# EAGLE board rotary-encoders (EAGLE 8.0.2)
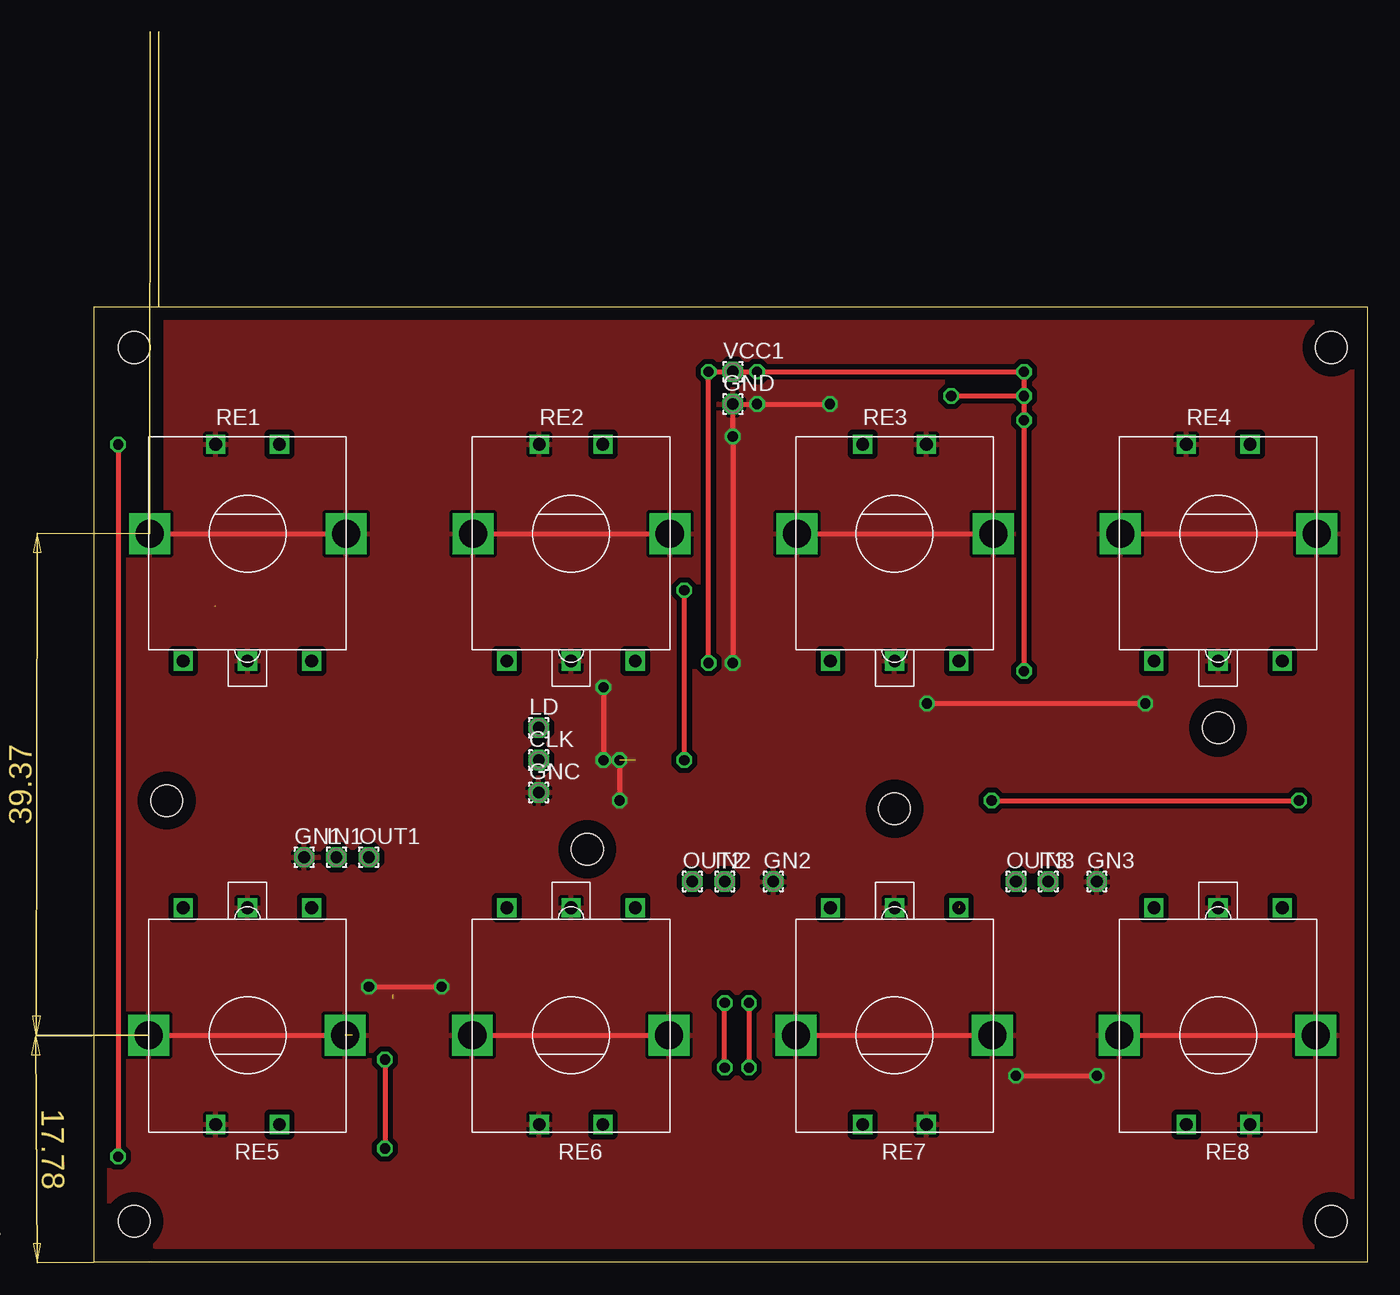
[diagram p0: board, top side]
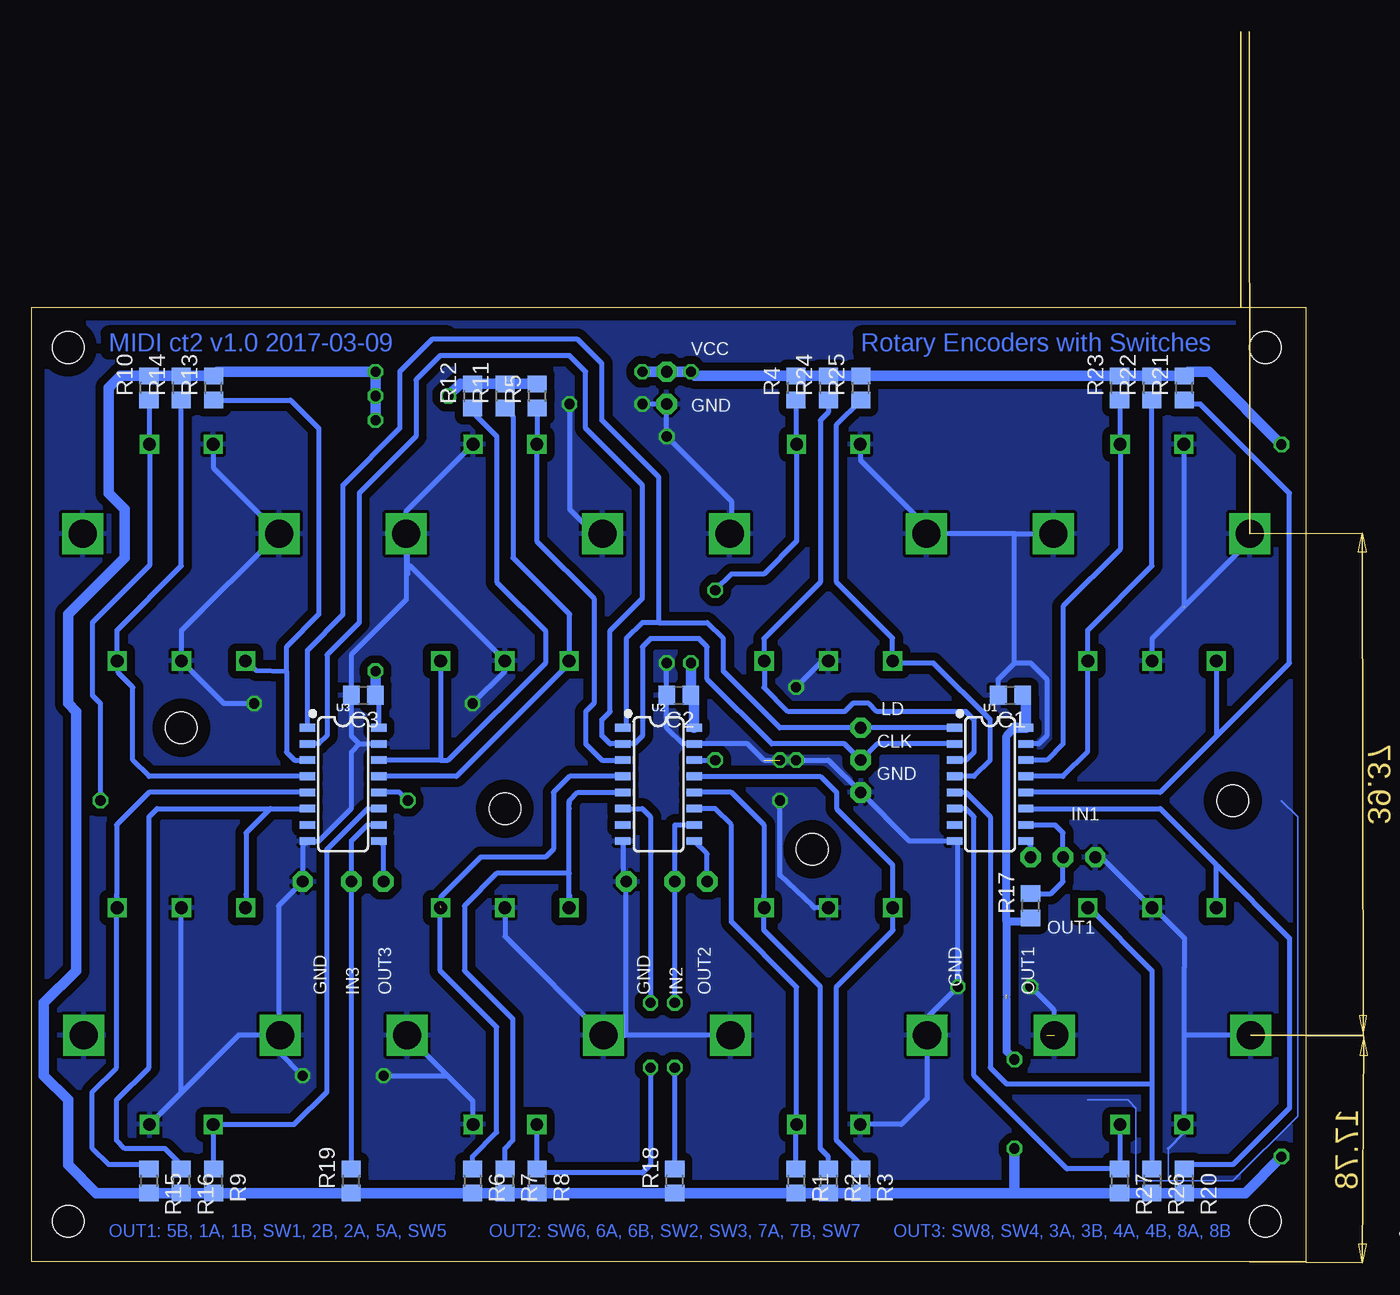
[diagram p1: board, bottom side, seen from below]

Size 100 x 74.92 mm. Coordinates in mm from the lower left corner, seen from the top.
Outline: 0,0 100,0 100,74.92 0,74.92 0,0
Copper layers (1*16): Top 0.035mm / dielectric 1.5mm / Bottom 0.035mm
Design rules "default *": minimum track width 10mil, minimum drill 24mil, track to track 16mil, track to pad 16mil, pad to pad 16mil, via to via 16mil, smd to smd 8mil, copper to edge 40mil, drill to drill 8mil, minimum pad ring 10mil, minimum via ring 8mil, stop-mask expansion 4mil, vias tented up to drill 0mil, thermal gap 10mil
Holes 2.5 mm at 97.16,3.17 3.17,3.17 3.17,71.75 97.16,71.75 5.71,36.2 88.27,41.91 62.87,35.56 38.73,32.38
Holes 0.6 mm at -7.92,73.15 -7.7,2.21 106.83,2.21 106.71,73.38
vRestrict: area 22.2,27.9 to 27.3,39.4; area 48.3,27.9 to 53.3,39.4; area 73,27.9 to 78.1,39.4

## Footprints (pad centres in the part's own frame; a part is rotated, then mirrored left to right if it is on the bottom)
C0805 = smd 1.3 x 1.5: 1 -0.95,0; 2 0.95,0
1,6/0,9 = drill 0.914 pad 1.6 octagon: 1 0,0
R0805 = smd 1.3 x 1.5: 1 -0.95,0; 2 0.95,0
EC16_SW = drill 1 square: A -5.04,-10; B 5.04,-10; C 0,-10; D -2.5,7; E 2.5,7 | drill 2.2 square: GND1 -7.675,0; GND2 7.75,0
SO16 = smd 0.6 x 1.2: 1 -4.445,-2.8; 2 -3.175,-2.8; 3 -1.905,-2.8; 4 -0.635,-2.8; 5 0.635,-2.8; 6 1.905,-2.8; 7 3.175,-2.8; 8 4.445,-2.8; 9 4.445,2.8; 10 3.175,2.8; 11 1.905,2.8; 12 0.635,2.8; 13 -0.635,2.8; 14 -1.905,2.8; 15 -3.175,2.8; 16 -4.445,2.8

## Placement (x,y rotation side)
C1  100nF  [C0805]  23.18,44.45 180 bottom
C2  100nF  [C0805]  49.21,44.45 180 bottom
C3  100nF  [C0805]  73.97,44.45 180 bottom
CLK  [1,6/0,9]  34.92,39.37 0 top
GN1  [1,6/0,9]  16.51,31.75 0 top
GN2  [1,6/0,9]  53.34,29.84 0 top
GN3  [1,6/0,9]  78.74,29.84 0 top
GNC  [1,6/0,9]  34.92,36.83 0 top
GND  [1,6/0,9]  50.16,67.31 0 top
IN1  [1,6/0,9]  19.05,31.75 0 top
IN2  [1,6/0,9]  49.53,29.84 0 top
IN3  [1,6/0,9]  74.93,29.84 0 top
LD  [1,6/0,9]  34.92,41.91 0 top
OUT1  [1,6/0,9]  21.59,31.75 0 top
OUT2  [1,6/0,9]  46.99,29.84 0 top
OUT3  [1,6/0,9]  72.39,29.84 0 top
R1  10K  [R0805]  40.01,6.35 270 bottom
R2  10K  [R0805]  37.47,6.35 270 bottom
R3  10K  [R0805]  34.92,6.35 270 bottom
R4  10K  [R0805]  40.01,68.58 90 bottom
R5  10K  [R0805]  60.33,67.94 90 bottom
R6  10K  [R0805]  65.41,6.35 270 bottom
R7  10K  [R0805]  62.87,6.35 270 bottom
R8  10K  [R0805]  60.33,6.35 270 bottom
R9  10K  [R0805]  85.72,6.35 270 bottom
R10  10K  [R0805]  90.81,68.58 90 bottom
R11  10K  [R0805]  62.87,67.94 90 bottom
R12  10K  [R0805]  65.41,67.94 90 bottom
R13  10K  [R0805]  85.72,68.58 90 bottom
R14  10K  [R0805]  88.27,68.58 90 bottom
R15  10K  [R0805]  90.81,6.35 270 bottom
R16  10K  [R0805]  88.27,6.35 270 bottom
R17  10K  [R0805]  21.59,27.94 90 bottom
R18  10K  [R0805]  49.53,6.35 90 bottom
R19  10K  [R0805]  74.93,6.35 90 bottom
R20  10K  [R0805]  9.53,6.35 270 bottom
R21  10K  [R0805]  9.53,68.58 90 bottom
R22  10K  [R0805]  12.06,68.58 90 bottom
R23  10K  [R0805]  14.61,68.58 90 bottom
R24  10K  [R0805]  37.47,68.58 90 bottom
R25  10K  [R0805]  34.92,68.58 90 bottom
R26  10K  [R0805]  12.06,6.35 270 bottom
R27  10K  [R0805]  14.61,6.35 270 bottom
RE1  EC16_SW  [EC16_SW]  12.06,57.15 0 top
RE2  EC16_SW  [EC16_SW]  37.47,57.15 0 top
RE3  EC16_SW  [EC16_SW]  62.87,57.15 0 top
RE4  EC16_SW  [EC16_SW]  88.27,57.15 0 top
RE5  EC16_SW  [EC16_SW]  12.06,17.78 180 top
RE6  EC16_SW  [EC16_SW]  37.47,17.78 180 top
RE7  EC16_SW  [EC16_SW]  62.87,17.78 180 top
RE8  EC16_SW  [EC16_SW]  88.27,17.78 180 top
U1  SN74HC165DR  [SO16]  24.77,37.47 270 bottom
U2  SN74HC165DR  [SO16]  50.8,37.47 270 bottom
U3  SN74HC165DR  [SO16]  75.56,37.47 270 bottom
VCC1  [1,6/0,9]  50.16,69.85 0 top

## Library data of the parts
C1-C3 R1-R27 = resistor
CLK GN1-GN3 GNC GND IN1-IN3 LD OUT1-OUT3 VCC1 = wirepad
RE1-RE8 = custom
U1-U3 = SparkFun-IC-Logic; PROD_ID: IC-11325

## Nets
CLK: CLK.1 U1.2 U2.2 U3.2
GND: C1.2 C2.2 C3.2 GN1.1 GN2.1 GN3.1 GNC.1 GND.1 RE1.C RE1.D RE1.GND1 RE1.GND2 RE2.C RE2.D RE2.GND1 RE2.GND2 RE3.C RE3.E RE3.GND1 RE3.GND2 RE4.C RE4.D RE4.GND1 RE4.GND2 RE5.C RE5.E RE5.GND1 RE5.GND2 RE6.C RE6.E RE6.GND1 RE6.GND2 RE7.C RE7.D RE7.GND1 RE7.GND2 RE8.C RE8.D RE8.GND1 RE8.GND2 U1.8 U1.15 U2.8 U2.15 U3.8 U3.15
IN1: IN1.1 R17.2 U1.10
IN2: IN2.1 R18.2 U2.10
IN3: IN3.1 R19.2 U3.10
LD: LD.1 U1.1 U2.1 U3.1
OUT1: OUT1.1 U1.9
OUT2: OUT2.1 U2.9
OUT3: OUT3.1 U3.9
RE1A: R21.1 RE1.A U1.12
RE1B: R22.1 RE1.B U1.13
RE2A: R25.1 RE2.A U1.4
RE2B: R24.1 RE2.B U1.3
RE3A: R11.1 RE3.A U3.13
RE3B: R12.1 RE3.B U3.14
RE4A: R13.1 RE4.A U3.3
RE4B: R14.1 RE4.B U3.4
RE5A: R26.1 RE5.A U1.5
RE5B: R20.1 RE5.B U1.11
RE6A: R2.1 RE6.A U2.12
RE6B: R3.1 RE6.B U2.13
RE7A: R6.1 RE7.A U2.4
RE7B: R7.1 RE7.B U2.5
RE8A: R15.1 RE8.A U3.5
RE8B: R16.1 RE8.B U3.6
SW1: R23.1 RE1.E U1.14
SW2: R4.1 RE2.E U2.14
SW3: R5.1 RE3.D U2.3
SW4: R10.1 RE4.E U3.12
SW5: R27.1 RE5.D U1.6
SW6: R1.1 RE6.D U2.11
SW7: R8.1 RE7.E U2.6
SW8: R9.1 RE8.E U3.11
VCC: C1.1 C2.1 C3.1 R1.2 R2.2 R3.2 R4.2 R5.2 R6.2 R7.2 R8.2 R9.2 R10.2 R11.2 R12.2 R13.2 R14.2 R15.2 R16.2 R17.1 R18.1 R19.1 R20.2 R21.2 R22.2 R23.2 R24.2 R25.2 R26.2 R27.2 U1.16 U2.16 U3.16 VCC1.1

## Tracks (layer width: path | path; a pad name or v marks a point on that pad's centre or on a via)
CLK
  Bottom 0.406: U3.2 77.47,40.64 76.83,41.27 76.83,47.62 74.3,50.16 74.3,60.33 69.85,64.77 69.85,69.22 67.94,71.12 57.78,71.12 56.52,69.85 56.52,65.41 52.07,60.96 52.07,52.07 54.61,49.53 54.61,43.18 55.24,42.55 55.24,41.27 54.61,40.64 U2.2 52.7,40.64 52.07,41.27 52.07,48.26 51.44,48.9 47.62,48.9 46.99,48.26 46.99,45.72 41.91,40.64 36.2,40.64 CLK.1 33.66,40.64 U1.2
GND  (via drill 0.8)  (3 unrouted)
  Top 0.406: RE1.GND1 RE1.GND2 | v50.16,46.99 v50.16,64.77 GND.1 v52.07,67.31 v57.78,67.31 | v40.01,45.09 v40.01,39.37 v41.27,39.37 v41.27,36.2 | v21.59,21.59 v27.3,21.59 | RE5.GND2 20.32,17.78 | RE2.GND1 RE2.GND2 | RE6.GND2 RE6.GND1 | RE3.GND1 RE3.GND2 | RE4.GND1 RE4.GND2 | RE8.GND2 RE8.GND1 | RE7.GND2 RE7.GND1 | v72.39,14.61 v78.74,14.61 | v65.41,43.81 v82.55,43.81
  Bottom 0.127: 10.79,8.89 10.79,6.35 | 10.79,6.35 5.71,6.35 0.64,11.43 0.64,34.92 1.91,36.2 | 10.79,6.35 13.34,6.35 13.34,12.06 13.97,12.7 17.14,12.7
  Bottom 0.254: RE5.E 9.56,10.12 10.79,8.89
  Bottom 0.406: RE1.D 9.56,51.4 12.06,48.9 RE1.C | C1.2 24.12,45.73 22.86,46.99 | 22.86,46.99 21.59,46.99 20.32,45.72 20.32,41.27 20.95,40.64 U1.15 | RE1.GND1 4.39,56.57 9.53,51.44 | 9.56,17.78 RE5.E | 9.56,17.78 9.56,23.11 9.53,23.14 9.53,25.4 11.9,27.78 RE5.C 16.04,31.75 GN1.1 | RE5.GND2 9.56,17.78 | RE6.E 34.95,10.79 31.75,10.79 29.71,12.83 RE6.GND2 29.71,19.18 v27.3,21.59 27.3,32.76 U1.8 31.11,33.02 GNC.1 37.47,39.37 42.55,39.37 43.81,40.64 U2.15 48.9,40.64 50.16,41.91 C2.2 v50.16,46.98 v50.16,46.99 | RE2.GND2 45.09,57.28 45.09,59.69 v50.16,64.77 GND.1 v52.07,67.31 | RE2.D 34.92,64.11 34.92,62.87 29.79,57.73 RE2.GND1 22.86,57.15 | 70.48,54.61 70.48,53.98 | 70.48,54.61 70.48,57.02 RE3.GND2 | RE3.GND2 70.61,58.9 RE3.E | RE7.C 62.87,25.53 RE7.GND2 53.34,17.78 | U2.8 53.6,30.11 GN2.1 53.34,17.78 | RE7.D 65.36,12.61 67.36,14.61 | 67.36,14.61 RE7.GND1 | 74.3,40.64 74.92,41.27 C3.2 74.93,47.62 70.61,51.94 RE3.GND2 | 74.3,40.64 U3.15 | 74.3,40.64 74.93,40.01 74.93,35.56 77.47,33.02 U3.8 78.74,32.65 GN3.1 80.64,27.94 80.64,17.91 RE8.GND2 | RE4.D 85.77,62.33 RE4.GND1 80.64,57.15 88.27,49.53 RE4.C 84.93,43.81 v82.55,43.81 | 88.27,13.28 RE8.C | 88.27,13.28 RE8.D | RE8.GND2 83.77,17.78 88.27,13.28 | v78.74,14.61 80.64,16.51 80.64,17.65 RE8.GND2 | v57.78,67.31 57.78,59.05 55.88,57.15 RE3.GND1 | 22.86,57.15 RE1.GND2 | 22.86,46.99 22.86,57.15 | RE2.C 37.94,47.15 v40.01,45.09 | RE6.GND1 53.34,17.78 | v72.39,14.61 67.36,14.61 | v65.41,43.81 62.87,46.35 RE3.C 70.33,54.61 70.48,54.61 | RE6.C 38.58,27.78 38.73,27.94 41.27,30.32 v41.27,36.2 | RE5.GND1 19.74,19.74 v21.59,21.59
  pour Bottom (isolate 0.635): 0,74.93 100.33,74.93 100.33,0 0,0
  pour Top: 0,74.93 100.33,74.93 100.33,0 0,0
IN1
  Bottom 0.406: U1.10 19.68,34.29 19.05,33.66 IN1.1 19.05,29.84 20,28.89 R17.2
IN2  (via drill 0.8)
  Top 0.406: v49.53,15.24 v49.53,20.32
  Bottom 0.406: U2.10 49.53,34.29 IN2.1 v49.53,20.32 | R18.2 v49.53,15.24
IN3
  Bottom 0.406: U3.10 73.66,34.29 74.93,33.02 IN3.1 R19.2
LD
  Bottom 0.406: 50.8,50.16 46.99,50.16 45.72,48.9 45.72,46.35 41.27,41.91 LD.1 U1.1 | U2.1 53.34,42.17 53.34,48.9 52.07,50.16 50.8,50.16 | 50.8,50.16 50.8,61.59 55.24,66.04 55.24,70.48 57.15,72.39 68.58,72.39 71.12,69.85 71.12,65.41 75.56,60.96 75.56,50.8 78.36,48 U3.1
OUT1
  Bottom 0.406: OUT1.1 21.59,32.65 U1.9
OUT2
  Bottom 0.406: OUT2.1 46.99,32.01 U2.9
OUT3
  Bottom 0.406: OUT3.1 72.39,32.65 U3.9
RE1A
  Bottom 0.406: RE1.A 7.03,41.23 | 7.03,41.23 11.43,36.83 U1.12 | 7.03,41.23 1.27,46.99 1.27,60.33 8.26,67.31 9.21,67.31 R21.1
RE1B
  Bottom 0.406: U1.13 19.05,38.1 17.11,40.05 RE1.B 17.11,49.57 12.06,54.61 R22.1
RE2A
  Bottom 0.406: U1.4 26.04,38.1 24.77,39.37 24.77,42.55 29.21,46.99 32.27,46.99 RE2.A 32.42,48.94 36.83,53.34 36.83,65.72 R25.1
RE2B
  Bottom 0.406: U1.3 26.67,39.37 26.04,40.01 26.04,42.55 26.67,43.18 33.66,43.18 34.29,43.81 35.56,43.81 36.2,43.18 40.64,43.18 42.55,45.09 42.51,45.12 RE2.B 42.55,47.19 42.55,48.9 38.1,53.34 38.1,66.04 37.47,66.67 R24.1
RE3A
  Bottom 0.406: R11.1 62.23,66.36 62.23,55.24 57.78,50.8 57.83,50.76 RE3.A 57.83,46.95 66.67,38.1 U3.13
RE3B
  Bottom 0.406: R12.1 65.41,66.67 63.5,64.77 63.5,53.34 59.69,49.53 59.69,46.99 67.31,39.37 67.94,39.37 | 67.94,39.37 U3.14 | RE3.B 67.91,39.41 67.94,39.37
RE4A
  Bottom 0.406: R13.1 79.69,67.63 77.47,65.41 77.47,50.8 80.01,48.26 80.01,46.35 | 80.01,46.35 80.01,40.01 79.38,39.37 U3.3 | RE4.A 82.37,46.4 80.01,46.35
RE4B
  Bottom 0.406: U3.4 90.81,38.1 92.08,39.37 92.08,45.09 93.1,46.11 93.22,46.24 RE4.B 93.31,49.57 88.27,54.61 88.27,67.31 88.58,67.31 R14.1
RE5A
  Bottom 0.406: 12.06,13.97 R26.1 | U1.5 26.67,36.83 24.77,34.92 24.77,15.24 23.5,13.97 12.06,13.97 | RE5.A 16.98,27.78 12.06,22.86 12.06,13.97
RE5B
  Bottom 0.406: R20.1 9.21,7.62 5.71,7.62 1.27,12.06 1.27,25.4 6.99,31.11 | U1.11 11.43,35.56 6.99,31.11 | RE5.B 7.03,31.07 6.99,31.11
RE6A
  Bottom 0.406: R2.1 37.47,8.26 38.1,8.89 38.1,21.59 42.55,26.04 42.55,28.74 RE6.A 42.51,34.25 45.09,36.83 U2.12
RE6B
  Bottom 0.406: R3.1 34.92,7.62 36.83,9.53 36.83,21.59 32.38,26.04 32.38,27.6 RE6.B | U2.13 38.1,38.1 36.83,36.83 36.83,35.56 32.42,31.16 RE6.B | 32.38,27.82 RE6.B
RE7A  (1 unrouted)
  Bottom 0.406: U2.4 57.78,38.1 59.05,36.83 59.05,32.38 59.69,31.75 64.77,31.75 67.91,28.61 RE7.A | R6.1 65.41,8.26 63.5,10.16 63.5,18.41 67.94,22.86 67.94,27.94
RE7B
  Bottom 0.406: R7.1 62.87,8.89 62.23,9.53 62.23,19.05 66.04,22.86 66.04,27.94 63.5,30.48 57.83,30.48 | 57.78,28.74 RE7.B 57.83,30.48 | 57.83,30.48 57.83,35.56 | 57.83,35.56 57.83,36.16 57.78,36.2 | 57.78,36.2 57.15,36.83 U2.5 | 57.83,35.56 57.78,36.2
RE8A
  Bottom 0.406: U3.5 90.81,36.83 93.34,34.29 93.34,28.82 RE8.A 93.34,28.74 93.34,15.24 95.25,13.34 95.25,8.89 93.98,7.62 91.44,7.62 91.12,7.3 R15.1
RE8B
  Bottom 0.406: 81.28,35.56 U3.6 | 81.28,35.56 83.19,33.66 83.19,28.82 RE8.B | R16.1 88.27,7.62 89.53,8.89 92.71,8.89 93.34,9.53 93.34,12.7 90.81,15.24 90.81,34.92 90.17,35.56 81.28,35.56
SW1
  Bottom 0.406: R23.1 14.61,64.19 RE1.E 14.56,55.92 19.05,51.44 19.05,40.64 20.32,39.37 U1.14
SW2  (via drill 0.8)
  Top 0.406: v46.35,39.37 v46.35,52.7
  Bottom 0.406: v46.35,52.7 45.09,53.98 42.55,53.98 39.97,56.55 RE2.E 40.01,64.19 R4.1 | U2.14 v46.35,39.37
SW3
  Bottom 0.406: R5.1 60.33,64.19 RE3.D 60.37,56.55 55.88,52.07 55.88,43.81 56.52,43.18 56.52,40.64 55.24,39.37 U2.3
SW4  (via drill 0.8)
  Top 0.406: v70.48,36.2 v94.61,36.2
  Bottom 0.406: R10.1 90.81,64.19 RE4.E 90.77,54.65 95.25,50.16 95.25,44.45 94.61,43.81 v94.61,36.2 | v70.48,36.2 71.12,36.83 U3.12
SW5
  Bottom 0.406: U1.6 26.67,35.56 26.04,34.92 26.04,14.61 18.73,7.3 R27.1 14.61,10.74 RE5.D
SW6
  Bottom 0.406: R1.1 40.01,10.74 RE6.D 39.97,21.55 45.09,26.67 45.09,34.29 46.35,35.56 U2.11
SW7  (via drill 0.8)
  Top 0.406: v51.44,20.32 v51.44,15.24
  Bottom 0.406: 60.35,10.79 RE7.E 60.33,10.74 R8.1 60.01,6.99 52.07,6.99 51.44,7.62 v51.44,15.24 | U2.6 52.07,35.56 51.44,34.92 v51.44,20.32
SW8
  Bottom 0.406: R9.1 85.72,10.74 RE8.E 79.39,10.78 76.83,13.34 76.83,32.38 73.66,35.56 U3.11
VCC  (via drill 0.8)  (1 unrouted)
  Top 0.406: v48.26,46.99 v48.26,69.85 VCC1.1 v52.07,69.85 v73.03,69.85 v73.03,67.94 | v22.86,15.88 v22.86,8.89 | v1.91,64.14 v1.91,8.26 | v67.31,67.94 v73.03,67.94 | v73.03,46.35 v73.03,66.04 v73.03,67.94
  Bottom 0.406: C3.1 72.77,44.19 U3.16 | 48,44.19 C2.1 | C1.1 21.96,44.19 | 47.94,69.53 v48.26,69.85 | 9.21,69.85 R21.2 | 85.41,69.85 R13.2 | R17.1 21.91,26.67
  Bottom 0.61: 23.5,20.64 23.5,16.51 v22.86,15.88 | 22.86,41.91 23.5,41.27 23.5,26.67 | 23.5,26.67 23.5,20.95 | 21.91,26.67 23.5,26.67
  Bottom 0.813: 48,44.19 U2.16 | 21.96,44.19 U1.16 22.86,41.91 | R21.2 R22.2 R23.2 R25.2 R24.2 R4.2 47.94,69.53 | R5.2 R11.2 R12.2 66.36,68.89 v67.31,67.94 | R13.2 R14.2 R10.2 93.03,69.53 93.98,68.58 93.98,60.33 92.71,59.05 92.71,55.24 97.16,50.8 97.16,43.81 96.52,43.18 96.52,22.86 99.06,20.32 99.06,14.61 97.16,12.7 97.16,7.62 94.94,5.4 R15.2 R16.2 R9.2 R19.1 R6.2 R7.2 R8.2 R18.1 R1.2 R2.2 R3.2 22.86,5.4 | C2.1 v48.26,46.99 | v48.26,69.85 VCC1.1 v52.07,69.85 | v1.91,64.14 7.62,69.85 9.21,69.85 | v1.91,8.26 4.76,5.4 R20.2 R26.2 R27.2 22.86,5.4 | C3.1 v73.03,46.35 | v73.03,66.04 v73.03,67.94 v73.03,69.85 85.41,69.85 | v22.86,8.89 22.86,5.4

## Text on the board
Bottom: Rotary Encoders with Switches | MIDI ct2 v1.0 2017-03-09 | OUT3: SW8, SW4, 3A, 3B, 4A, 4B, 8A, 8B | OUT2: SW6, 6A, 6B, SW2, SW3, 7A, 7B, SW7 | OUT1: 5B, 1A, 1B, SW1, 2B, 2A, 5A, SW5
bNames: VCC | GND | LD | CLK | GND | IN1 | OUT1 | GND | OUT1 | OUT2 | IN2 | GND | OUT3 | IN3 | GND